# Altium PCB SPARK_Controller.PcbDoc (part 2 of 2)
Units mm, origin at the board's own origin, x right, y up, seen from the top; angles counter-clockwise.
Board outline 173.28 x 117.98 mm, 2 copper layers (Top Layer, Bottom Layer); 146 components, 113 nets, 445 pads, 537 vias.
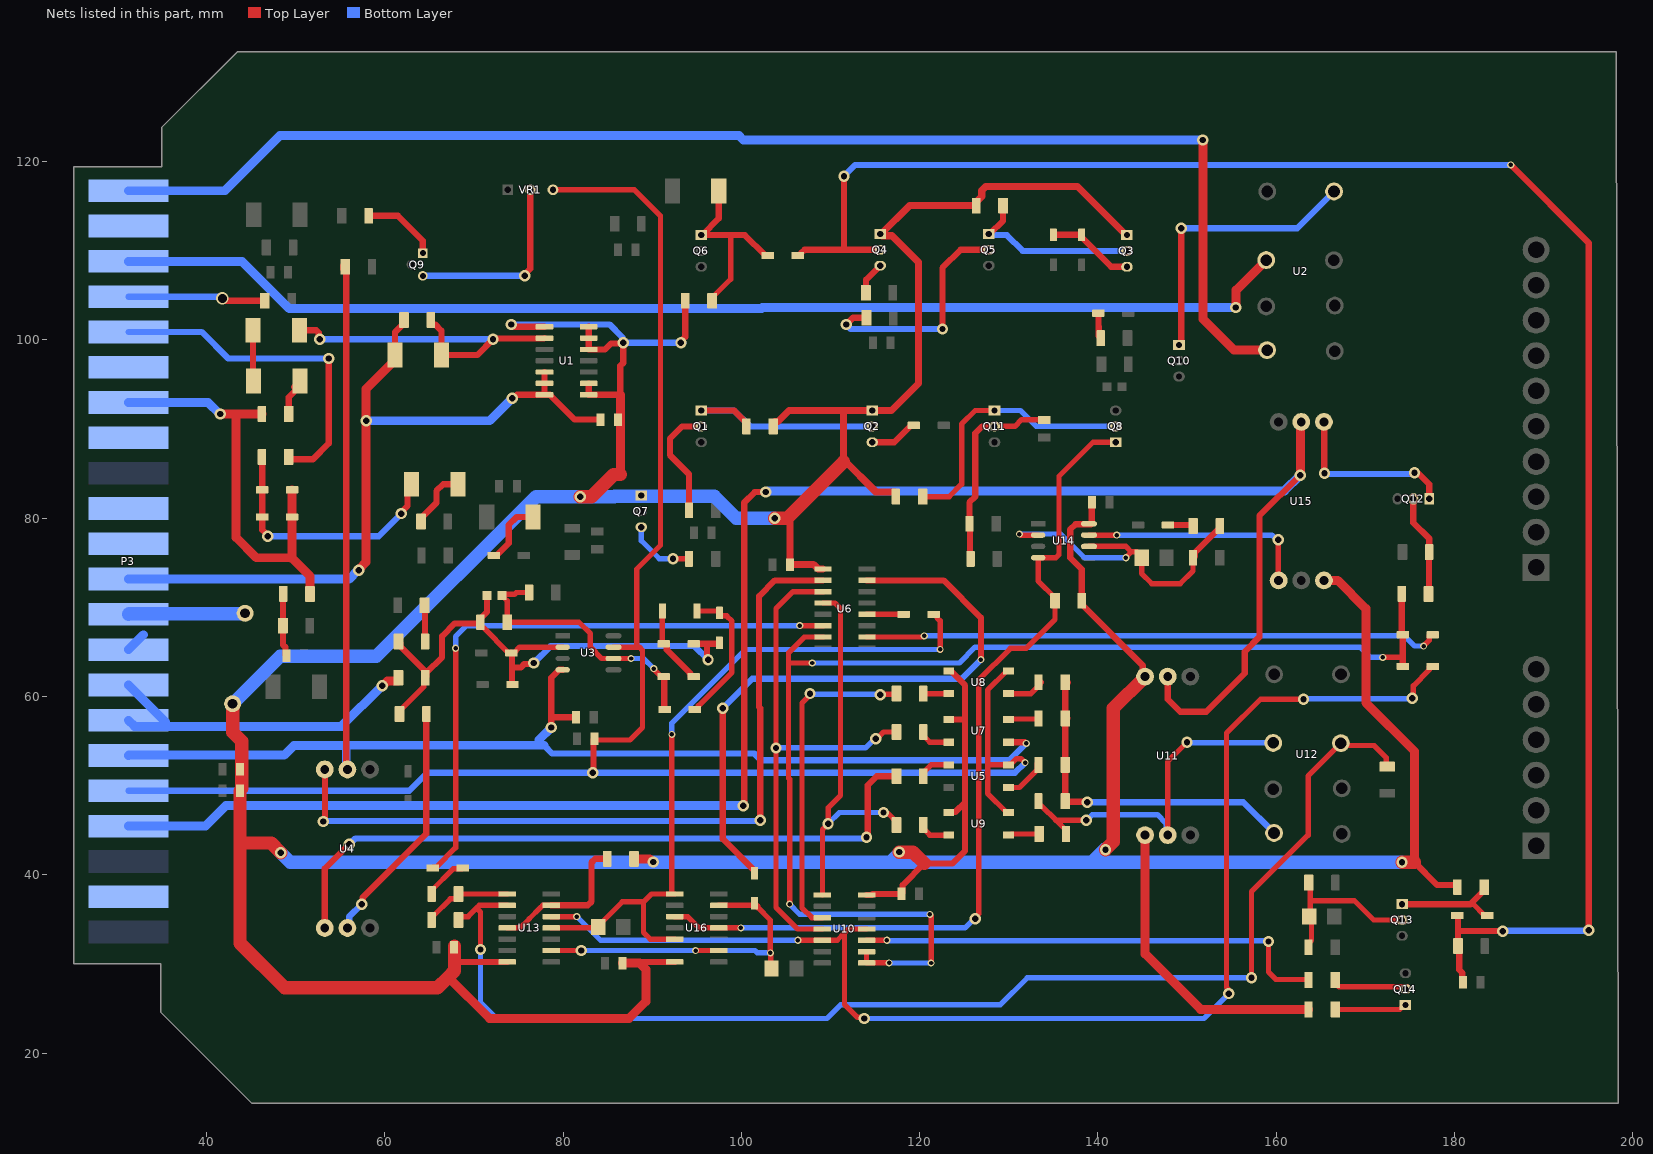
[diagram p2: the nets of this part, all layers, seen from the top]

## Via types
v1: diameter 0.8, hole 0.5, Top Layer to Bottom Layer, 434 vias
v2: diameter 1.27, hole 0.711, Top Layer to Bottom Layer, 102 vias
v3: diameter 1.4, hole 1, Top Layer to Bottom Layer, 1 vias

## Nets (pads, with @x,y where several pads share a name; then routed paths per layer and width w, separated by ;. In a path a pad name is that pad's centre, name@x,y a point inside that pad or via, vN(x,y) a via of type N, cw(c..) or ccw(c..) an arc to the next point about the centre after c; other vN are vias at no path point) (continued)
NetC8_2: C8.2 R21.1 R22.2 | length 7.1
  Top Layer w0.7: R22.2@48.609,71.501 48.591,71.483 48.591,67.963 R21.1@48.573,67.945 48.573,65.805 48.859,65.519 48.859,64.679 C8.2@48.959,64.579
NetC10_1: C10.1 D20.A D21.C R27.1 R30.2 U3.6 | length 31.2
  Top Layer w0.6: R30.2@76.184,71.672 74.761,71.672 74.552,71.463 73.299,71.463 C10.1@73.152,71.316 73.728,70.74 R27.1@73.728,68.326 81.788,68.326 83.058,67.056 83.058,65.532 84.328,64.262 v1(87.63,64.262) ; v1(90.17,63.119) 90.208,63.081 90.208,63.006 91.048,62.166 D20.A@91.348,62.166
  Top Layer w0.7: D20.A@91.348,62.166 91.348,58.61 D21.C@91.411,58.547
  Bottom Layer w0.6: v1(87.63,64.262) 89.027,64.262 v1(90.17,63.119)
NetC10_2: C10.2 D18.C D19.A D22.C D24.A R26.1 R27.2 R28.2 R29.1 U3.2 | length 67.4
  Top Layer w0.6: R29.1@61.654,58.039 61.654,58.379 64.362,61.087 64.362,62.173 R28.2@64.412,62.223 ; R27.2@70.723,68.326 70.723,68.319 70.723,67.911 70.893,67.741 71.053,67.741 73.897,64.897 D18.C@74.197,64.897 74.497,64.897 75.132,65.532 U3.2@79.954,65.532
  Top Layer w0.7: R26.1@61.527,66.167 61.722,65.972 61.722,65.632 64.412,62.942 R28.2@64.412,62.223 ; R28.2@64.532,62.11 64.652,62.23 64.652,62.638 66.421,64.407 66.421,66.777 67.843,68.199 70.603,68.199 R27.2@70.723,68.319 ; R27.2@70.723,68.326 70.723,68.741 71.452,69.47 C10.2@71.452,71.316 ; D18.C@74.197,64.897 74.26,64.834 74.26,63.246 ; D19.A@74.324,61.341 74.26,61.404 74.26,63.246 ; v2(76.708,63.754) 76.599,63.645 75.649,63.645 75.25,63.246 74.26,63.246 ; D24.A@94.644,65.913 96.065,65.913 ; v2(96.266,64.135) 96.158,64.243 96.158,65.82 96.065,65.913 ; D22.C@97.536,66.011 97.536,65.963 97.486,65.913 96.065,65.913
  Bottom Layer w0.7: v2(76.708,63.754) 78.613,65.659 94.742,65.659 v2(96.266,64.135)
NetC12_2: C12.2 R43.2 R44.2 U14.2 U14.6 | length 37.5
  Top Layer w0.6: v1(131.191,78.225) 131.245,78.225 131.365,78.105 U14.2@133.294,78.105 ; U14.6@138.994,76.835 143.129,76.835 143.735,76.229 ; v1(143.129,75.565) 143.129,75.619 143.735,76.225 143.735,76.229 ; C12.2@144.901,75.692 144.364,76.229 143.735,76.229 ; C12.2@144.904,75.565 144.904,73.79 146.05,72.644 149.225,72.644 150.665,74.084 R44.2@150.665,75.565
  Top Layer w0.7: R44.2@150.86,75.692 150.86,76.107 153.339,78.586 153.566,78.586 153.686,78.706 R43.2@153.686,79.121 R43.2@153.813,78.994
  Bottom Layer w0.6: v1(131.191,78.225) 135.83,78.225 138.49,75.565 v1(143.129,75.565)
NetC13_2: C13.2 Q11.1 R46.2 R47.2 | length 22.8
  Top Layer w0.6: Q11.1@128.397,90.297 130.683,90.297 131.445,91.059 133.921,91.059 C13.2@133.985,90.995
  Top Layer w0.7: R46.2@125.714,75.438 125.651,75.501 125.651,79.311 R47.2@125.587,79.375 125.587,81.772 126.238,82.423 126.238,89.535 127,90.297 Q11.1@128.397,90.297
NetC16_1: C16.1 Q13.1 R51.2 R52.1 | length 18.7
  Top Layer w0.6: R51.2@163.624,31.877 163.624,32.292 163.954,32.622 163.954,35.306 163.83,35.43 163.83,37.176 ; R52.1@163.635,39.116 163.83,38.921 163.83,37.176 ; Q13.1@174.117,34.925 170.942,34.925 168.783,37.084 163.922,37.084 163.83,37.176
NetC17_1: C17.1 D2.C D31.C Q4.1 R56.1 | length 205.3
  Top Layer w0.7: D2.C@106.328,109.474 106.628,109.474 106.678,109.524 106.678,109.699 107.088,110.109 111.329,110.109 ; v2(111.506,118.364) 111.506,110.286 111.329,110.109 ; Q4.1@115.57,110.109 111.329,110.109 ; D31.C@180.311,35.433 180.35,35.433 180.4,35.383 180.4,33.694 ; C17.1@180.975,27.94 180.875,28.04 180.875,28.99 180.527,29.338 180.527,31.877 R56.1@180.4,32.004 180.4,33.694 ; v2@185.402,33.637 v2(185.42,33.655) 185.381,33.694 180.4,33.694 ; v1(186.309,119.634) 195.072,110.871 v2(195.072,33.782)
  Bottom Layer w0.7: v2(111.506,118.364) 112.776,119.634 v1(186.309,119.634) ; v2(185.42,33.655) 185.483,33.718 195.008,33.718 v2(195.072,33.782)
NetD1_A: D1.A D4.C | length 5.7
  Top Layer w0.7: D4.C@45.212,101.092 45.212,95.444 D1.A@45.279,95.377
NetD1_C: D1.C R5.1 | length 5.1
  Top Layer w0.7: R5.1@49.217,91.694 49.217,93.575 50.479,94.837 D1.C@50.479,95.377 D1.C@49.829,94.727
NetD2_A: D2.A D5.C Q6.3 R4.1 | length 22.4
  Top Layer w0.6: R4.1@96.715,104.394 96.715,104.734 98.806,106.825 98.806,111.76
  Top Layer w0.7: Q6.3@95.504,111.76 Q6.3@95.604,111.76 ; D5.C@97.469,116.713 97.469,113.625 Q6.3@95.604,111.76 ; D2.A@102.968,109.474 102.668,109.474 100.382,111.76 98.806,111.76 Q6.3@95.604,111.76
NetD4_A: D4.A D9.C R10.2 U1.2 | length 39.5
  Top Layer w0.7: D4.A@50.412,101.092 52.295,101.092 52.596,100.791 52.596,100.185 v2(52.705,100.076) ; R10.2@65.167,102.235 65.167,101.82 65.287,101.7 65.686,101.7 66.354,101.032 D9.C@66.354,98.298 70.358,98.298 v2(72.136,100.076) 72.213,100.153 77.866,100.153 U1.2@77.916,100.203
  Bottom Layer w0.7: v2(52.705,100.076) v2(72.136,100.076)
NetD6_A: D6.A Q2.2 | length 5.5
  Top Layer w0.7: Q2.2@114.681,88.519 117.146,88.519 119.051,90.424 D6.A@119.351,90.424
NetD7_A: D7.A D8.A Q3.2 | length 9.4
  Top Layer w0.7: D8.A@135.001,111.789 D7.A@138.176,111.789 138.176,111.489 138.226,111.439 138.243,111.439 141.478,108.204 Q3.2@142.748,108.204
NetD10_C: D10.C R13.2 | length 2.9
  Top Layer w0.7: D10.C@140.052,102.997 140.052,101.502 140.081,101.473 140.081,100.441 R13.2@140.319,100.203
NetD11_A: D11.A D12.C | length 7.4
  Top Layer w0.7: D11.A@72.234,75.819 72.534,75.819 73.914,77.199 73.914,79.248 74.803,80.137 D12.C@76.641,80.137
NetD15_A: D15.A R17.1 | length 6.9
  Top Layer w0.7: R17.1@64.051,79.629 64.051,79.969 65.786,81.704 65.786,83.058 66.548,83.82 D15.A@68.199,83.82
NetD15_C: D15.C D16.A D17.A R23.2 | length 29.5
  Top Layer w0.7: R23.2@46.237,87.372 D16.A@46.237,83.185 D17.A@46.237,80.137 46.237,78.687 46.863,78.061 v2(46.863,77.978) ; v2(61.849,80.518) 61.849,80.672 62.557,81.38 62.557,83.378 D15.C@62.999,83.82
  Bottom Layer w0.7: v2(46.863,77.978) 59.309,77.978 v2(61.849,80.518)
NetD20_C: D20.C D23.C D24.C | length 9.4
  Top Layer w0.6: D23.C@91.141,69.596 91.141,66.013 91.241,65.913 D24.C@91.284,65.913
  Top Layer w0.7: D24.C@91.284,65.913 91.384,66.013 D24.C@91.484,66.013 ; D24.C@91.584,65.913 91.634,65.863 91.634,65.24 94.144,62.73 94.144,62.69 94.294,62.54 94.294,62.28 94.344,62.23 D20.C@94.944,62.23
NetD21_A: D21.A D22.A D23.A | length 16.5
  Top Layer w0.6: D21.A@94.771,58.547 95.071,58.547 95.171,58.647 95.171,58.947 98.933,62.709 98.933,68.453 98.341,69.045 97.636,69.045 97.536,69.145 D22.A@97.536,69.371 ; D23.A@95.041,69.596 97.436,69.596 D22.A@97.436,69.171
NetD25_C: D25.C R42.2 | length 4.9
  Top Layer w0.6: R42.2@65.262,37.846 65.262,38.261 67.668,40.667 68.636,40.667 D25.C@68.736,40.767
NetD26_C: D26.C R43.1 | length 2.9
  Top Layer w0.7: D26.C@147.857,79.248 150.554,79.248 R43.1@150.681,79.121
NetD29_C: D29.C U6.12 | length 4.2
  Top Layer w0.6: U6.12@114.078,69.215 117.781,69.215 117.908,69.088 D29.C@118.208,69.088
NetD30_C: D30.C U6.15 | length 70.4
  Top Layer w0.7: v2(97.917,58.674) 97.917,44.017 101.473,40.461 D30.C@101.473,40.161 ; U6.15@114.078,73.025 122.682,73.025 126.873,68.834 v1(126.873,64.135)
  Bottom Layer w0.7: v2(97.917,58.674) 101.219,61.976 124.714,61.976 v1(126.873,64.135)
NetD31_A: D31.A Q13.3 R50.1 | length 12.6
  Top Layer w0.6: 181.764,36.703 182.101,36.703 183.371,35.433 D31.A@183.671,35.433
  Top Layer w0.7: Q13.3@174.117,36.703 181.764,36.703 183.329,38.268 R50.1@183.329,38.608
NetQ1_1: Q1.1 R12.2 | length 13
  Top Layer w0.7: R12.2@94.123,80.899 94.123,84.947 91.982,87.088 91.982,88.934 93.345,90.297 Q1.1@95.504,90.297
NetQ1_3: Q1.3 Q2.1 R1.2 | length 26
  Top Layer w0.7: Q1.3@95.504,92.075 99.205,92.075 100.568,90.712 R1.2@100.568,90.297
  Bottom Layer w0.7: Q1.3@95.504,92.075 99.187,92.075 100.965,90.297 Q2.1@114.681,90.297
NetQ3_1: Q3.1 Q5.3 R2.1 | length 19.7
  Top Layer w0.7: Q5.3@127.762,111.887 127.862,111.887 129.354,113.379 R2.1@129.354,115.062
  Bottom Layer w0.7: Q5.3@127.762,111.887 127.889,111.76 129.794,111.76 131.572,109.982 Q3.1@142.748,109.982
NetQ4_2: Q4.2 R8.1 | length 3.7
  Top Layer w0.7: R8.1@113.978,105.283 113.985,105.29 113.985,106.746 Q4.2@115.57,108.331
NetQ5_1: Q5.1 R14.1 | length 26.5
  Top Layer w0.7: v2(111.76,101.727) 112.522,102.489 R14.1@114.037,102.489 ; v2(122.555,101.219) 122.555,108.077 124.587,110.109 Q5.1@127.762,110.109
  Bottom Layer w0.7: v2(111.76,101.727) 112.268,101.219 v2(122.555,101.219)
NetQ7_2: Q7.2 R11.2 | length 7.7
  Top Layer w0.6: v2(92.329,75.438) R11.2@94.123,75.438
  Bottom Layer w0.6: Q7.2@88.773,78.994 88.773,77.47 90.794,75.449 92.318,75.449 v2(92.329,75.438)
NetQ8_1: Q8.1 Q11.3 R45.1 | length 30.4
  Top Layer w0.6: R45.1@120.337,82.423 123.317,82.423 124.714,83.82 124.714,90.551 126.238,92.075 Q11.3@128.397,92.075 Q11.3@128.497,92.075
  Bottom Layer w0.6: Q11.3@128.397,92.075 131.318,92.075 133.096,90.297 Q8.1@141.986,90.297
NetQ9_1: Q9.1 R19.2 | length 8.6
  Top Layer w0.7: R19.2@58.182,113.919 61.468,113.919 64.262,111.125 Q9.1@64.262,109.728
NetQ9_3: Q9.3 VR1.2 | length 21.3
  Top Layer w0.7: v2(75.692,107.188) 75.692,107.342 76.327,107.977 VR1.2@76.327,116.84
  Bottom Layer w0.7: Q9.3@64.262,107.188 v2(75.692,107.188)
NetQ10_3: Q10.3 U2.8 | length 32.1
  Top Layer w0.7: Q10.3@149.098,99.441 149.152,99.441 149.352,99.641 v2(149.352,112.522)
  Bottom Layer w0.7: v2(149.352,112.522) 162.354,112.522 U2.8@166.487,116.655
NetQ12_1: Q12.1 R48.2 R49.1 | length 11.7
  Top Layer w0.7: Q12.1@175.387,82.423 175.387,79.502 177.165,77.724 R48.2@177.165,76.2 177.128,76.162 177.128,71.539 R49.1@177.09,71.501
NetQ12_3: Q12.3 U15.1 | length 19.3
  Top Layer w0.7: U15.1@165.354,90.805 165.386,90.773 165.386,85.058 v2(165.417,85.026) v2@165.481,84.963 ; v2@175.233,84.963 175.36,85.09 v2(175.514,85.09) ; v2@176.004,84.981 177.165,83.82 Q12.3@177.165,82.169
  Bottom Layer w0.7: v2@165.481,84.963 v2@175.233,84.963
NetQ14_1: Q14.1 R54.1 | length 8.6
  Top Layer w0.6: R54.1@166.629,28.194 166.629,27.854 167.051,27.432 Q14.1@174.72,27.432
NetQ14_3: Q14.3 R53.1 | length 8.4
  Top Layer w0.6: R53.1@166.629,24.892 173.858,24.892 174.62,25.654 Q14.3@174.72,25.654
NetR24_1: R24.1 R26.2 | length 4.1
  Top Layer w0.7: R24.1@64.457,70.231 64.494,70.193 64.494,66.205 R26.2@64.532,66.167
NetR29_2: R29.2 U4.4 | length 27.7
  Top Layer w0.7: v2(57.404,36.703) 57.513,36.812 57.513,37.447 64.659,44.593 R29.2@64.659,58.039
  Bottom Layer w0.7: U4.4@55.803,34.036 56.019,34.253 56.019,35.318 v2(57.404,36.703)
NetR31_1: R31.1 U4.6 | length 78.4
  Top Layer w0.7: U4.6@53.263,34.038 53.263,40.69 v2(56.007,43.434) ; v2(114.046,44.196) 114.155,44.305 114.155,44.708 114.173,44.726 114.173,50.038 115.189,51.054 R31.1@117.407,51.054
  Bottom Layer w0.7: v2(56.007,43.434) 56.067,43.434 56.702,44.069 113.765,44.069 113.892,44.196 v2(114.046,44.196)
NetR31_2: R31.2 U5.1 | length 3.6
  Top Layer w0.6: R31.2@120.412,51.054 120.412,51.469 121.267,52.324 U5.1@123.269,52.324
NetR32_1: R32.1 R33.1 R34.1 R35.1 U12.4 | length 38.6
  Top Layer w0.6: R32.1@136.339,52.324 R32.1@136.398,52.265
  Top Layer w0.7: R34.1@136.339,61.595 R33.1@136.339,57.531 R32.1@136.339,52.324 ; R32.1@136.369,52.236 R32.1@136.398,52.265 ; R32.1@136.373,52.358 R32.1@136.339,52.324 ; R33.1@136.564,57.56 R33.1@136.598,57.526 ; R34.1@136.593,61.595 R34.1@136.623,61.566 ; v2(138.811,48.133) 138.748,48.197 136.334,48.197 136.305,48.226 R35.1@136.339,48.26 R32.1@136.339,52.324
  Bottom Layer w0.7: v2(138.811,48.133) 156.309,48.133 U12.4@159.756,44.686
NetR32_2: R32.2 U5.3 | length 4.9
  Top Layer w0.6: U5.3@129.969,49.784 131.209,49.784 133.164,51.739 133.207,51.782 R32.2@133.207,52.451
  Top Layer w0.7: R32.2@133.207,52.451 R32.2@133.334,52.324
NetR33_2: R33.2 U7.4 | length 3.4
  Top Layer w0.6: U7.4@129.969,57.404 130.033,57.468 133.27,57.468 R33.2@133.334,57.531
NetR34_2: R34.2 U8.3 | length 4.2
  Top Layer w0.6: U8.3@129.969,60.325 132.479,60.325 133.461,61.307 R34.2@133.461,61.468
  Top Layer w0.7: R34.2@133.461,61.468 R34.2@133.588,61.595
NetR35_2: R35.2 R36.2 U11.3 U12.2 | length 40.6
  Top Layer w0.6: R35.2@133.334,48.26 133.334,47.845 133.504,47.675 133.731,47.675 135.28,46.126 ; R36.2@136.414,44.577 136.414,44.992 135.28,46.126 ; v2(138.684,46.101) 138.659,46.126 135.28,46.126 ; U11.3@147.828,44.45 147.828,52.705 v2(149.987,54.864) ; U12.2@159.581,54.864 U12.2@159.657,54.788
  Bottom Layer w0.6: v2(138.684,46.101) 138.735,46.101 139.37,46.736 146.685,46.736 147.656,45.765 147.656,44.622 U11.3@147.828,44.45 ; v2(149.987,54.864) 150.025,54.826 159.619,54.826 U12.2@159.657,54.788
NetR36_1: R36.1 U9.3 | length 3.5
  Top Layer w0.6: U9.3@129.969,44.45 130.169,44.45 130.296,44.577 R36.1@133.409,44.577
NetR37_2: R37.2 U7.2 | length 3.6
  Top Layer w0.6: R37.2@120.412,56.007 120.412,55.592 121.14,54.864 U7.2@123.269,54.864
NetR38_2: R38.2 U8.2 | length 2.9
  Top Layer w0.6: R38.2@120.412,60.325 U8.2@123.269,60.325
NetR39_2: R39.2 U9.2 | length 3.6
  Top Layer w0.6: R39.2@120.412,45.593 120.412,45.178 121.14,44.45 U9.2@123.269,44.45
NetR40_2: R40.2 R42.1 U13.8 | length 10.1
  Top Layer w0.6: R40.2@65.262,34.798 65.432,34.968 65.432,35.383 67.352,37.303 68.022,37.303 68.267,37.548 R42.1@68.267,37.846 U13.8@73.725,37.846
NetR53_2: R53.2 U11.1 | length 34.2
  Top Layer w1: U11.1@145.288,44.45 145.288,31.115 151.511,24.892 R53.2@163.624,24.892
NetU14_7: U14.7 U15.6 | length 26
  Top Layer w0.6: U14.7@138.994,78.105 v1(142.113,78.105) ; v2(160.22,77.597) 160.247,77.57 160.247,73.052 U15.6@160.274,73.025
  Bottom Layer w0.6: v1(142.113,78.105) 159.53,78.105 160.038,77.597 v2(160.22,77.597)
PAD_02: P3.21
PAD_04: P3.19 U11.4 U15.3 | length 212
  Top Layer w0.7: v2(100.203,47.752) 100.312,47.861 100.312,48.264 100.33,48.282 100.33,81.759 101.502,82.931 v2(102.743,82.931) ; U11.4@147.828,62.23 147.828,59.69 149.225,58.293 152.146,58.293 156.464,62.611 156.464,65.024 158.115,66.675 158.115,80.264 v2(162.687,84.836)
  Top Layer w1: v2(162.687,84.836) 162.739,84.888 162.739,90.73 U15.3@162.814,90.805
  Bottom Layer w1: P3.19@31.242,45.455 39.867,45.455 42.164,47.752 v2(100.203,47.752) ; v2(102.743,82.931) 102.795,82.983 102.986,82.983 103.061,83.058 160.909,83.058 v2(162.687,84.836)
PAD_05: C11.2 P3.18 U3.7 U5.4 U8.4 U9.4 VR1.3 | length 209.3
  Top Layer w0.6: VR1.3@78.867,116.84 88.011,116.84 90.932,113.919 90.932,76.962 88.265,74.295 88.265,65.532 ; C11.2@83.502,55.245 83.629,55.118 87.503,55.118 88.9,56.515 88.9,65.181 88.549,65.532 88.265,65.532 ; U3.7@85.654,65.532 88.265,65.532 ; U9.4@129.969,46.99 129.769,46.99 127.635,49.124 127.635,52.324 ; U8.4@129.969,62.865 129.769,62.865 127.635,60.731 127.635,52.324 ; v1(131.826,52.578) 131.373,53.031 130.876,53.031 130.269,52.424 130.069,52.424 U5.4@129.969,52.324 127.635,52.324
  Top Layer w0.7: v2(83.312,51.435) 83.407,51.53 83.407,55.15 C11.2@83.502,55.245
  Bottom Layer w0.7: P3.18@31.242,49.415 62.75,49.415 64.77,51.435 v2(83.312,51.435) 130.683,51.435 v1(131.826,52.578)
PAD_06: C9.2 P3.17 R25.1 U3.4 U4.3 U7.3 | length 177
  Top Layer w0.7: R25.1@55.304,108.331 55.304,107.991 55.676,107.619 U4.3@55.676,51.816 ; v2(78.667,56.515) 78.667,57.912 ; U3.4@79.954,62.992 79.554,62.992 79.454,62.892 78.667,62.105 78.667,57.912 ; C9.2@81.471,57.658 78.921,57.658 78.667,57.912 ; U7.3@129.969,54.864 131.799,54.864 131.926,54.737 v1(131.953,54.737)
  Bottom Layer w0.7: 77.27,55.118 77.856,54.532 78.794,53.594 101.448,53.594 102.198,52.844 130.06,52.844 v1(131.953,54.737)
  Bottom Layer w1: P3.17@31.242,53.375 31.287,53.42 48.721,53.42 49.784,54.483 55.676,54.483 ; U4.3@55.676,51.816 55.676,54.532 77.856,54.532 ; 77.27,55.118 v2(78.667,56.515)
PAD_07: P3.15 P3.16 R28.1 | length 39
  Top Layer w1: v2(59.701,61.214) 59.774,61.214 60.278,61.718 61.482,61.718 61.527,61.763 R28.1@61.527,62.103
  Bottom Layer w1: P3.16@31.242,57.335 31.935,56.642 55.129,56.642 v2(59.701,61.214) ; P3.15@31.282,61.255 P3.15@31.242,61.295 P3.16@35.387,57.15
PAD_08: F1.1 P3.13 P3.14 | length 15.5
  Bottom Layer w1: P3.14@31.242,65.255 32.916,66.929
  Bottom Layer w1.5: P3.13@31.242,69.215 31.3,69.273 44.268,69.273 F1.1@44.326,69.332
PAD_09: C19.1 D9.A P3.11 P3.12 R10.1 U1.5 U1.6 U1.7 | length 87.9
  Top Layer w0.7: D9.A@61.154,98.298 61.154,100.887 62.162,101.895 R10.1@62.162,102.235 R10.1@62.162,102.575 ; v2(74.295,93.472) 74.449,93.472 74.83,93.853 U1.7@77.916,93.853 ; U1.5@77.916,96.393 U1.6@77.916,95.123 U1.7@77.916,93.853 ; C19.1@84.201,91.059 81.295,91.059 78.501,93.853 U1.7@77.916,93.853
  Top Layer w1: v2(57.061,74.168) 57.061,74.241 57.912,75.092 v2(57.912,90.932) 57.912,94.516 61.154,97.758 D9.A@61.154,98.298
  Bottom Layer w1: P3.12@31.242,73.175 55.995,73.175 56.988,74.168 v2(57.061,74.168) ; v2(57.912,90.932) 71.755,90.932 v2(74.295,93.472)
PAD_10: P3.10
PAD_12: P3.8
PAD_13: D16.C D17.C P3.6 P3.7 R5.2 R22.1 | length 49.1
  Top Layer w1: v2(41.529,91.694) 43.307,91.694 ; R5.2@46.212,91.694 43.307,91.694 ; D16.C@49.597,83.185 D17.C@49.597,80.137 49.597,75.498 ; R22.1@51.614,71.501 51.614,73.481 49.597,75.498 ; 43.307,91.694 43.307,77.851 45.593,75.565 49.53,75.565 49.597,75.498
  Bottom Layer w1: P3.7@31.242,92.975 40.175,92.975 41.456,91.694 v2(41.529,91.694)
PAD_14: P3.5 R23.1 | length 38.1
  Top Layer w0.7: R23.1@49.642,86.614 51.943,86.614 53.721,88.392 v2(53.721,97.917)
  Bottom Layer w0.7: P3.5@31.242,100.895 39.44,100.895 42.418,97.917 v2(53.721,97.917)
PAD_15: P3.4 R20.1 | length 15.5
  Top Layer w0.7: v3(41.783,104.648) 41.891,104.648 42.145,104.394 R20.1@46.541,104.394
  Bottom Layer w0.7: P3.4@31.242,104.855 41.468,104.855 41.675,104.648 v3(41.783,104.648)
PAD_16: P3.3 U2.2 | length 133.2
  Top Layer w1: v2(155.448,103.632) 155.5,103.684 155.5,105.581 U2.2@158.877,108.958
  Bottom Layer w1: P3.3@31.242,108.815 43.966,108.815 49.276,103.505 102.262,103.505 102.389,103.632 v2(155.448,103.632)
PAD_17: P3.2
PAD_18: P3.1 U2.4 | length 152
  Top Layer w1: v2(151.765,122.428) 151.765,102.362 155.27,98.857 U2.4@158.976,98.857
  Bottom Layer w1: P3.1@31.242,116.735 42.059,116.735 48.26,122.936 99.722,122.936 100.23,122.428 v2(151.765,122.428)
Reset_TIM: Q8.3 R58.1 U14.4 U16.4 U16.10 | length 99.9
  Top Layer w0.6: U16.10@92.521,35.306 93.98,35.306 95.25,34.036 U16.4@97.471,34.036 v1(99.949,34.036) ; v2(126.238,35.052) 126.238,35.233 126.619,35.614 126.619,61.849 130.175,65.405 131.953,65.405 135.187,68.639 R58.1@135.187,70.739 135.187,71.079 133.294,72.972 U14.4@133.294,75.565 135.285,75.565 135.636,75.916 135.636,84.709 139.446,88.519 Q8.3@141.986,88.519
  Bottom Layer w0.6: v1(99.949,34.036) 125.083,34.036 126.099,35.052 v2(126.238,35.052)
U6_2: U4.5 U6.2 | length 88.1
  Top Layer w0.7: v2(53.086,45.974) 53.086,46.128 53.301,46.344 53.301,51.777 U4.5@53.263,51.816 ; v2(102.108,46.101) 102.108,58.688 101.981,58.815 101.981,71.247 103.759,73.025 U6.2@109.168,73.025
  Bottom Layer w0.7: v2(53.086,45.974) 53.149,46.038 102.044,46.038 v2(102.108,46.101)
U6_4: R39.1 U6.4 U10.1 | length 44.2
  Top Layer w0.6: U10.1@109.093,37.73 109.093,45.085 v2(109.728,45.72) 109.728,47.498 111.125,48.895 111.125,69.85 110.49,70.485 U6.4@109.168,70.485 ; v2(115.951,46.99) 116.079,46.862 116.478,46.862 117.407,45.933 R39.1@117.407,45.593
  Bottom Layer w0.6: v2(109.728,45.72) 110.998,46.99 v2(115.951,46.99)
U6_6: D25.A U6.6 | length 68.9
  Top Layer w0.6: D25.A@65.376,40.767 65.476,40.867 65.776,40.867 67.945,43.036 v1(67.945,65.405) ; v1(106.553,67.945) U6.6@109.168,67.945
  Bottom Layer w0.6: v1(67.945,65.405) 67.945,66.729 69.161,67.945 v1(106.553,67.945)
U6_10: D28.A U6.10 | length 64.9
  Top Layer w0.6: U6.10@114.078,66.675 120.342,66.675 120.469,66.802 v1(120.523,66.802) ; v1(176.53,65.659) 177.164,66.293 177.164,66.829 177.264,66.929 D28.A@177.564,66.929
  Bottom Layer w0.6: v1(120.523,66.802) 174.371,66.802 175.514,65.659 v1(176.53,65.659)
U10_3: R38.1 U10.3 | length 37
  Top Layer w0.6: v2(107.696,60.325) 107.696,60.144 106.807,59.255 106.807,36.292 107.91,35.19 U10.3@109.093,35.19 ; v2(115.57,60.198) 115.633,60.261 117.343,60.261 R38.1@117.407,60.325
  Bottom Layer w0.6: v2(107.696,60.325) 107.759,60.261 115.506,60.261 v2(115.57,60.198)
U10_4: R37.1 U6.3 U10.4 | length 60.1
  Top Layer w0.6: U10.4@109.093,33.92 106.288,33.92 103.886,36.322 103.886,69.85 105.791,71.755 U6.3@109.168,71.755 ; v2(115.062,55.245) 115.2,55.245 115.962,56.007 R37.1@117.407,56.007
  Bottom Layer w0.6: v2(103.886,54.229) 113.907,54.229 114.923,55.245 v2(115.062,55.245)
U10_8: D27.C D28.C R49.2 U6.7 U10.8 U10.9 | length 141.5
  Top Layer w0.6: v1(105.41,36.703) 105.41,50.7 105.283,50.827 105.283,63.754 ; v1(107.95,63.754) 105.283,63.754 ; U6.7@109.168,66.675 107.061,66.675 105.283,64.897 105.283,63.754 ; U10.9@114.043,31.38 U10.8@114.043,30.11 v1(116.575,30.11) v1@116.586,30.099 ; v1(121.158,35.56) 121.158,35.506 121.285,35.379 v1(121.285,30.099) ; v1(171.958,64.389) 174.077,64.389 174.204,64.262
  Top Layer w0.7: R49.2@174.085,71.501 174.085,67.048 D28.C@174.204,66.929 174.204,64.262 D27.C@174.204,63.373
  Bottom Layer w0.6: v1(105.41,36.703) 106.553,35.56 v1(121.158,35.56) ; v1(107.95,63.754) 124.455,63.754 126.233,65.532 169.418,65.532 170.561,64.389 v1(171.958,64.389) ; v1(116.575,30.11) 116.581,30.104 121.28,30.104 v1(121.285,30.099)
U10_10: R54.2 U10.10 | length 53.5
  Top Layer w0.6: U10.10@114.043,32.65 v1(116.321,32.65) v1@116.332,32.639 ; v2(159.131,32.512) 159.131,29.083 159.957,28.258 163.561,28.258 R54.2@163.624,28.194
  Bottom Layer w0.6: v1(116.321,32.65) 116.36,32.611 159.032,32.611 v2(159.131,32.512)
U10_11: D27.A U10.5 U10.11 U13.5 | length 146.4
  Top Layer w0.6: U13.5@78.675,35.306 v1(81.534,35.306) ; v1(106.343,32.65) U10.5@109.093,32.65 110.755,32.65 111.569,33.465 ; v2(113.792,23.876) 113.664,24.004 113.029,24.004 111.569,25.463 111.569,33.465 ; U10.11@114.043,33.92 112.025,33.92 111.569,33.465 ; v2(154.686,26.67) 154.558,26.798 154.558,27.231 154.432,27.356 154.432,55.88 158.242,59.69 v2(163.068,59.69) ; v2(175.26,59.817) 175.388,59.945 175.388,61.197 177.164,62.973 177.164,63.273 177.264,63.373 D27.A@177.564,63.373
  Bottom Layer w0.6: v1(81.534,35.306) 84.19,32.65 v1(106.343,32.65) ; v2(113.792,23.876) 151.892,23.876 v2(154.686,26.67) ; v2(163.068,59.69) 163.131,59.753 175.196,59.753 v2(175.26,59.817)
U13_2: C14.2 D30.A U13.2 U16.2 U16.6 | length 39.3
  Top Layer w0.6: U13.2@78.675,31.496 v2(82.042,31.496) ; v1(94.869,31.496) U16.2@97.471,31.496 ; U16.6@97.471,36.576 101.473,36.576 101.744,36.576 101.844,36.476 101.844,36.303 103.251,34.896 v1(103.251,31.242) 103.289,31.204 103.289,29.55 C14.2@103.375,29.464
  Bottom Layer w0.6: v2(82.042,31.496) v1(94.869,31.496) 101.524,31.496 101.778,31.242 v1(103.251,31.242)
U13_4: C15.2 D29.A U13.4 U16.8 U16.12 | length 80
  Top Layer w0.6: U13.4@78.675,34.036 83.817,34.036 C15.2@83.944,34.163 83.944,34.263 86.638,36.957 89.027,36.957 ; v1(92.202,55.753) U16.8@92.202,37.846 ; U16.12@92.521,32.766 89.789,32.766 89.027,33.528 89.027,36.957 ; U16.8@92.521,37.846 U16.8@92.202,37.846 ; D29.A@121.568,69.215 121.868,69.215 121.968,69.115 121.968,68.815 122.301,68.482 v1(122.301,65.278) v1@122.301,65.151 ; 89.027,36.957 89.916,37.846 U16.8@92.202,37.846
  Bottom Layer w0.6: v1(92.202,55.753) 92.202,57.023 100.457,65.278 v1(122.301,65.278)
U13_06: R57.2 U13.6 U13.11 | length 17
  Top Layer w0.6: U13.11@73.725,34.036 75.184,34.036 76.2,35.052 76.2,35.062 77.444,36.306 77.714,36.576 U13.6@78.675,36.576
  Top Layer w0.7: U13.6@78.675,36.576 82.775,36.576 83.185,36.986 83.185,41.373 83.595,41.783 R57.2@84.947,41.783
U13_09: R40.1 R41.1 U12.7 U13.9 | length 143.4
  Top Layer w0.6: R40.1@68.267,34.925 68.267,35.062 68.512,35.307 69.343,35.307 70.294,36.258 ; v2(70.739,31.623) 70.739,35.814 70.294,36.258 ; U13.9@73.725,36.576 70.612,36.576 70.294,36.258 ; v2@157.226,28.194 v2(157.226,28.448) 157.226,38.1 163.576,44.45 163.576,51.087 166.799,54.31 U12.7@167.206,54.31 ; U12.7@167.256,54.767 167.524,54.5 170.993,54.5 172.339,53.154 172.339,52.265 R41.1@172.466,52.138
  Bottom Layer w0.6: v2(70.739,31.623) 70.739,25.654 72.517,23.876 109.601,23.876 111.125,25.4 129.032,25.4 132.08,28.448 v2(157.226,28.448)
VCC+12V0: C18.1 C19.2 C20.2 C21.1 C22.2 C23.1 C24.2 C25.2 F1.2 Q2.3 Q3.3 Q4.3 Q7.3 R1.1 R2.2 R4.2 R45.2 R50.2 R57.1 R58.2 U1.1 U1.8 U1.9 U1.12 U1.13 U1.14 U6.1 U7.1 U8.1 U9.1 U10.14 U11.2 U13.14 U14.8 U15.2 U16.14 | length 603.9
  Top Layer w0.7: 67.818,30.226 U13.14@73.725,30.226 ; v2@74.576,101.473 U1.1@77.916,101.473 ; U1.9@82.866,95.123 U1.8@82.866,93.853 86.423,93.853 86.423,97.092 86.741,97.409 v2(86.741,99.695) 86.632,99.586 85.362,99.586 84.709,98.933 U1.12@82.866,98.933 U1.13@82.866,100.203 U1.14@82.866,101.473 ; 88.568,30.099 88.695,30.226 U16.14@92.521,30.226 ; v2(93.218,99.695) 93.218,99.849 93.71,100.341 R4.2@93.71,104.394 ; U10.14@114.043,37.73 114.628,37.73 114.744,37.846 C22.2@117.983,37.846 118.083,37.946 118.083,38.835 120.523,41.275 123.698,41.275 125.095,42.672 125.095,48.133 ; U9.1@123.269,46.99 123.319,47.04 124.002,47.04 125.095,48.133 ; U7.1@123.269,57.404 124.968,57.404 125.095,57.531 ; U8.1@123.269,62.865 123.469,62.865 125.095,61.239 125.095,57.531 ; C21.1@139.319,81.788 139.319,79.425 139.219,79.325 137.491,79.325 136.906,78.74 136.906,75.568 138.192,74.282 R58.2@138.192,70.739 138.192,70.324 145.039,63.477 145.039,62.479 U11.2@145.288,62.23 ; 175.514,41.402 178.071,38.845 180.204,38.845 180.324,38.725 R50.2@180.324,38.608 ; 125.095,48.133 125.095,57.531
  Top Layer w0.8: R1.1@103.573,90.297 103.573,90.637 103.768,90.832 104.108,90.832 105.351,92.075 111.464,92.075 ; 105.156,80.01 105.156,79.883 105.474,79.565 C20.2@105.474,74.803 108.11,74.803 108.618,74.295 U6.1@109.168,74.295 ; 111.464,86.318 111.464,92.075 ; 111.464,86.572 115.077,82.958 117.212,82.958 117.332,82.838 R45.2@117.332,82.423 ; Q3.3@143.256,111.76 143.156,111.76 137.695,117.221 127.41,117.221 126.964,116.775 126.964,116.092 126.349,115.477 R2.2@126.349,115.062 118.845,115.062 115.67,111.887 Q4.3@115.57,111.887 115.77,111.687 116.913,111.687 119.888,108.712 119.888,95.123 116.84,92.075 Q2.3@114.681,92.075 111.464,92.075
  Top Layer w1: 67.12,28.511 71.755,23.876 87.376,23.876 89.281,25.781 89.281,29.386 88.568,30.099 C18.1@86.677,30.099 ; 86.423,84.9 86.423,93.853 ; R57.1@87.952,41.783 89.711,41.783 90.055,41.439 v2(90.128,41.439) ; U15.2@165.354,73.025 165.36,73.019 166.884,73.019 170.053,69.85 170.053,59.309 175.514,53.848 175.514,41.402
  Top Layer w1.5: F1.2@42.926,59.182 42.926,55.985 43.942,54.969 C24.2@43.942,49.717 ; C24.2@43.752,49.403 43.752,43.561 ; v2(48.323,42.481) 47.244,43.561 43.752,43.561 ; C23.1@67.818,32.004 67.818,30.226 67.818,29.21 67.12,28.511 65.913,27.305 48.768,27.305 43.752,32.322 43.752,43.561 ; v2(81.915,82.423) 83.185,82.423 85.661,84.9 86.423,84.9 ; v2(103.759,80.01) 105.156,80.01 111.464,86.318 ; v2(117.729,42.545) 119.253,42.545 120.523,41.275 ; v2(140.843,42.799) 141.732,43.688 141.732,58.674 U11.2@145.288,62.23 ; v2(174.117,41.402) 175.514,41.402
  Bottom Layer w0.7: v2(74.168,101.727) 85.217,101.727 86.632,100.312 86.632,99.804 v2(86.741,99.695) v2(93.218,99.695) v2@93.472,99.695
  Bottom Layer w1: v2@89.662,41.402 89.699,41.439 v2(90.128,41.439)
  Bottom Layer w1.5: F1.2@42.926,59.182 48.26,64.516 59.055,64.516 76.962,82.423 v2(81.915,82.423) 85.722,82.423 85.771,82.472 96.979,82.472 99.441,80.01 v2(103.759,80.01) ; v2(48.323,42.481) 49.403,41.402 89.662,41.402 116.713,41.402 ; v2@117.602,42.291 116.713,41.402 ; v2@140.779,42.862 139.319,41.402 ; v2(174.117,41.402) 139.319,41.402 ; 116.713,41.402 139.319,41.402
pads on no net: U1.4 U1.10 U1.11 U2.3 U2.6 U3.1 U3.5 U3.8 U6.13 U6.16 U10.6 U11.5 U11.6 U12.3 U12.6 U14.5 U16.1 U16.3 U16.11 U16.13

## Polygon pours and split planes (outlines as drawn)
GND on Bottom Layer "GND_L02_P001" (solid, remove dead copper, pour order 1): 43.883,130.497 37.97,124.584 38.1,22.606 45.15,15.556 196.596,15.43 196.596,130.866
GND on Top Layer "GND_L01_P000" (solid, remove dead copper, pour order 0): 44.256,131.124 37.97,124.838 38.1,22.479 45.402,15.177 197.104,15.56 197.104,131.494

## Keep-outs
Keep-Out Layer:
  lines w0.5: 25.098,30.022 34.877,30.022 34.877,24.561 45.087,14.351 198.378,14.351 198.172,132.334 43.463,132.334 35.004,123.875 35.004,119.449 25.098,119.449 25.098,30.784 25.098,30.022

## Other copper
Bottom Layer:
  rectangle net PAD_09: 26.67,72.009 35.814,78.232
  rectangle net PAD_07: 26.67,56.134 35.814,62.611
  rectangle net PAD_08: 26.67,64.008 35.814,70.485
  rectangle net PAD_13: 26.67,91.694 35.814,98.171

## Silkscreen, mask and mechanical layers (free items; w line width, h text height)
Bottom Solder:
  rectangle: 26.67,55.88 35.814,62.611
  rectangle: 26.67,63.881 35.814,70.612
  rectangle: 26.67,71.755 35.814,78.486
  rectangle: 26.67,91.567 35.814,98.298

## Text inside footprints (layer, text, board x,y; h text height)
P3: Top Overlay "1" at 39.57,117.697 h0.8